# EAGLE board PKD_shield.brd.job (EAGLE 6.2)

Size 68.58 x 53.34 mm. Coordinates in mm from the lower left corner, seen from the top.
Outline: 64.52,53.34 66.04,51.82 66.04,40.39 68.58,37.85 68.58,5.08 66.04,2.54 66.04,1 arc-90 65.04,0 1,0 arc-90 0,1 0,52.34 arc-90 1,53.34 64.52,53.34
Copper layers (1*16): Top 0.035mm / dielectric 1.5mm / Bottom 0.035mm
Design rules: minimum track width 10mil, minimum drill 24mil, track to track 8mil, track to pad 8mil, pad to pad 8mil, via to via 8mil, smd to smd 8mil, copper to edge 40mil, drill to drill 8mil, minimum pad ring 10mil, minimum via ring 8mil, stop-mask expansion 2mil, vias tented up to drill 0mil, thermal gap 10mil
Net classes: 0 default: width 32 mm, clearance 16 mm
Holes 3.2 mm at 15.24,50.8 66.04,7.62 66.04,35.56

## Footprints (pad centres in the part's own frame; a part is rotated, then mirrored left to right if it is on the bottom)
1X06 = drill 1.016 long: 1 -6.35,0; 2 -3.81,0; 3 -1.27,0; 4 1.27,0; 5 3.81,0; 6 6.35,0
C025-025X050 = drill 0.813 octagon: 1 -1.27,0; 2 1.27,0
C050-030X075 = drill 0.813 octagon: 1 -2.54,0; 2 2.54,0
DO35-10 = drill 0.813 long: A 5.08,0; C -5.08,0
DIL20 = drill 0.813 long: 1 -11.43,-3.81; 2 -8.89,-3.81; 3 -6.35,-3.81; 4 -3.81,-3.81; 5 -1.27,-3.81; 6 1.27,-3.81; 7 3.81,-3.81; 8 6.35,-3.81; 9 8.89,-3.81; 10 11.43,-3.81; 11 11.43,3.81; 12 8.89,3.81; 13 6.35,3.81; 14 3.81,3.81; 15 1.27,3.81; 16 -1.27,3.81; 17 -3.81,3.81; 18 -6.35,3.81; 19 -8.89,3.81; 20 -11.43,3.81
DIL8 = drill 0.813 long: 1 -3.81,-3.81; 2 -1.27,-3.81; 3 1.27,-3.81; 4 3.81,-3.81; 5 3.81,3.81; 6 1.27,3.81; 7 -1.27,3.81; 8 -3.81,3.81
DIL08 = drill 0.813 pad 1.27: 1 -3.81,-3.81; 2 -1.27,-3.81; 3 1.27,-3.81; 4 3.81,-3.81; 5 3.81,3.81; 6 1.27,3.81; 7 -1.27,3.81; 8 -3.81,3.81
1X08-TH = drill 0.95 pad 1.422 long: 1 -8.89,0; 2 -6.35,0; 3 -3.81,0; 4 -1.27,0; 5 1.27,0; 6 3.81,0; 7 6.35,0; 8 8.89,0
1X10-TH = drill 0.95 pad 1.422 long: 1 -11.43,0; 2 -8.89,0; 3 -6.35,0; 4 -3.81,0; 5 -1.27,0; 6 1.27,0; 7 3.81,0; 8 6.35,0; 9 8.89,0; 10 11.43,0
1X03/90 = drill 1.016 long: 1 -2.54,-3.81; 2 0,-3.81; 3 2.54,-3.81
TO92- = drill 0.813 long: 1 2.54,0; 2 0,0; 3 -2.54,0
0207/10 = drill 0.813 octagon: 1 -5.08,0; 2 5.08,0

## Placement (x,y rotation side)
ANALOG  [1X06]  57.15,2.54 0 top
C1  1n  [C025-025X050]  52.07,11.43 180 top
C2  1n  [C050-030X075]  60.96,11.43 0 top
C3  100p  [C025-025X050]  31.75,17.78 0 top
C6  1n  [C025-025X050]  21.72,37.85 0 top
C7  2n2  [C025-025X050]  21.84,33.66 0 top
D1  1N4148  [DO35-10]  12.57,37.97 0 top
D2  1N4148  [DO35-10]  12.57,35.56 0 top
IC1  74HCT244N  [DIL20]  49.53,35.56 180 top
IC3  PIC12F683P  [DIL8]  11.43,21.59 0 top
IC4  TL072P  [DIL08]  11.43,8.89 0 top
J1  [1X08-TH]  54.61,50.8 180 top
J2  [1X08-TH]  36.83,2.54 0 top
J3  [1X10-TH]  30.23,50.8 180 top
J4  [1X10-TH]  30.23,48.26 180 top
J5  [1X08-TH]  54.61,48.26 180 top
J6  [1X06]  57.15,5.08 0 top
JP2  [1X03/90]  -0.13,37.08 90 top
POWER  [1X08-TH]  36.83,5.08 0 top
Q1  BS170  [TO92-]  7.75,45.59 0 top
R1  100k  [0207/10]  55.88,21.59 90 top
R4  100k  [0207/10]  63.5,19.05 90 top
R7  510k  [0207/10]  48.26,25.4 180 top
R8  100k  [0207/10]  48.26,16.51 90 top
R9  10k  [0207/10]  25.4,16.51 270 top
R10  100k  [0207/10]  35.56,12.7 0 top
R11  33  [0207/10]  12.95,32.64 180 top
R12  220  [0207/10]  13.08,40.64 180 top

## Library data of the parts
ANALOG J6 JP2 = pinhead
C1-C3 C6 C7 R1 R4 R7-R12 = rcl
D1 D2 = diode
IC1 = 74xx-eu
IC3 = microchip; MF: MICROCHIP; MPN: PIC12F683-I/P; OC_FARNELL: 9759034; OC_NEWARK: 89H0442
IC4 = linear
J1-J5 POWER = SmartPrj
Q1 = adam

## Nets
+9V: J2.8 POWER.8
ANT_LO: C6.1 C7.1 D1.A JP2.3 R12.2
BIT_IN: IC3.3 J3.4 J4.4
EMU_NOE: IC1.19 J3.5 J4.5
GEN_OE: IC1.1 J3.1 J4.1
GND: C2.2 C6.2 C7.2 D2.A IC1.10 IC3.8 J2.7 POWER.7 Q1.3 R4.1 R7.2
LO_PKD: J1.2 J5.2
LO_PKD_U: C3.2 IC4.1 R10.2
N$1: J2.3 POWER.3
N$3: J3.6 J4.6
N$5: IC1.9 Q1.2
N$8: J1.1 J5.1
N$11: J1.4 J5.4
N$12: J1.5 J5.5
N$13: J1.6 J5.6
N$14: J1.7 J5.7
N$15: J1.8 J5.8
N$16: IC4.5 R1.1 R4.2
N$17: C1.1 C2.1 D1.C D2.C R7.1
N$18: ANALOG.1 J6.1
N$19: ANALOG.2 J6.2
N$20: ANALOG.3 J6.3
N$21: ANALOG.4 J6.4
N$22: ANALOG.5 J6.5
N$23: ANALOG.6 J6.6
N$24: J3.7 J4.7
N$25: J2.6 POWER.6
N$26: C1.2 IC4.3 R8.1
N$27: C3.1 IC4.2 R9.2 R10.1
N$29: JP2.1 R11.2
N$30: IC1.12 IC1.14 IC1.16 IC1.18 R11.1
N$31: J2.2 POWER.2
N$32: J2.1 POWER.1
N$34: Q1.1 R12.1
N$141: J3.9 J4.9
N$142: J3.10 J4.10
N$222: J3.8 J4.8
N$223: J2.4 POWER.4
NRST: IC3.4 J3.3 J4.3
OCLK: IC3.6 J1.3 J5.3
PWR_LO: IC1.2 IC1.4 IC1.6 IC1.8 IC1.11 IC3.5
R/E: IC3.7 J3.2 J4.2
V+: IC4.8
V-: IC4.4
VCC: IC1.20 IC3.1 J2.5 POWER.5 R1.2
VMID: IC4.6 IC4.7 R8.2 R9.1

## Tracks (layer width: path | path; a pad name or v marks a point on that pad's centre or on a via)
+9V  (1 unrouted)
ANT_LO  (4 unrouted)
BIT_IN  (2 unrouted)
EMU_NOE  (2 unrouted)
GEN_OE  (2 unrouted)
GND  (10 unrouted)
LO_PKD  (1 unrouted)
LO_PKD_U  (2 unrouted)
N$1  (1 unrouted)
N$3  (1 unrouted)
N$5  (1 unrouted)
N$8  (1 unrouted)
N$11  (1 unrouted)
N$12  (1 unrouted)
N$13  (1 unrouted)
N$14  (1 unrouted)
N$15  (1 unrouted)
N$16  (2 unrouted)
N$17  (4 unrouted)
N$18  (1 unrouted)
N$19  (1 unrouted)
N$20  (1 unrouted)
N$21  (1 unrouted)
N$22  (1 unrouted)
N$23  (1 unrouted)
N$24  (1 unrouted)
N$25  (1 unrouted)
N$26  (2 unrouted)
N$27  (3 unrouted)
N$29  (1 unrouted)
N$30  (4 unrouted)
N$31  (1 unrouted)
N$32  (1 unrouted)
N$34  (1 unrouted)
N$141  (1 unrouted)
N$142  (1 unrouted)
N$222  (1 unrouted)
N$223  (1 unrouted)
NRST  (2 unrouted)
OCLK  (2 unrouted)
PWR_LO  (5 unrouted)
R/E  (2 unrouted)
VCC  (4 unrouted)
VMID  (3 unrouted)

## Text on the board
tPlace: 9 | 8 | 7 | 6 | 5 | 4 | 3 | 2 | 1 | 0 | 13 | 12 | 11 | 10
tNames: DIGITAL | AREF | SCL | SDA | GND | RES | 3V3 | 5V Gnd 9V | 0 1 2 3 4 5
bStop: DIGITAL | SDA | AREF | SCL | GND | 13 | 12 | 11 | 9 | 8 | 7 | 6 | 5 | 4 | 3 | 2 | 1 | 0 | 10 | IOREF | RST | 3.3V | 5V | GND | GND | VIN | ANALOG | 0 | 1 | 2 | 3 | 4 | 5
Reference: USB | ETH